# EAGLE board ALIM (EAGLE 7.2.0)
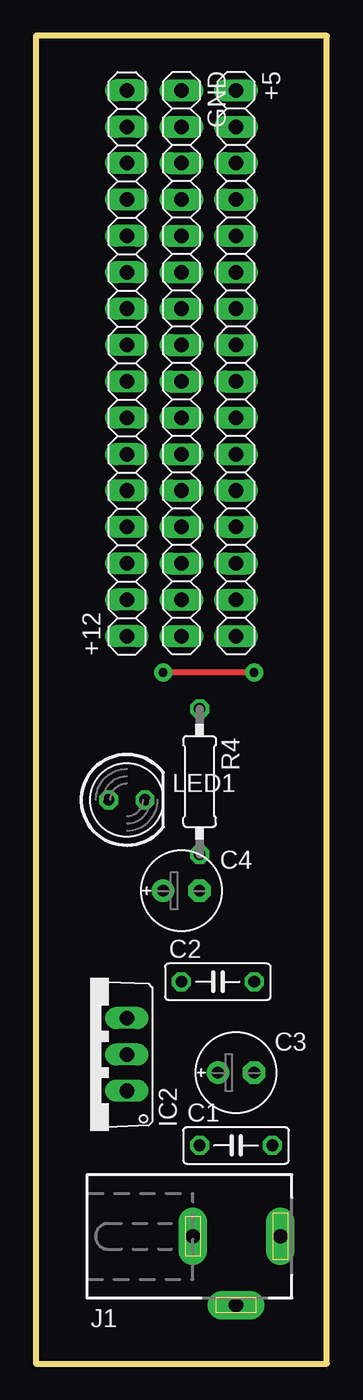
[diagram p0: board, top side]
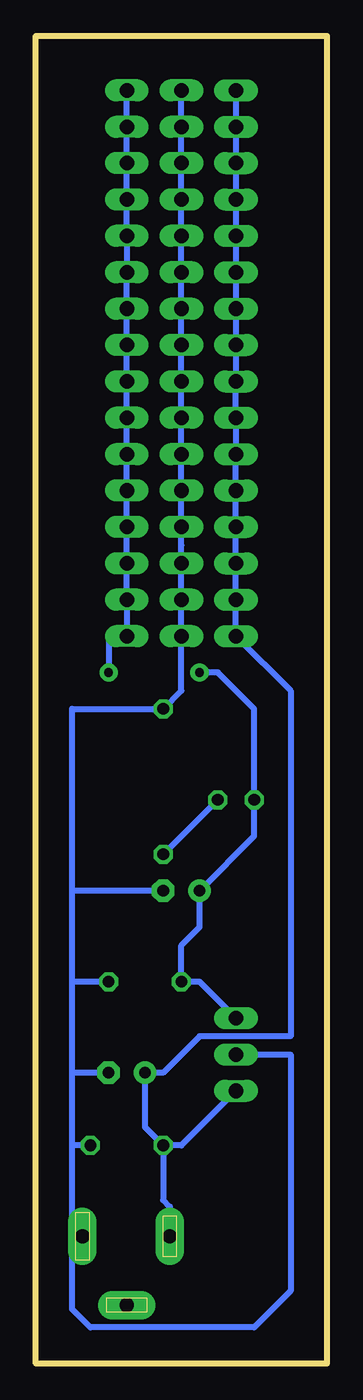
[diagram p1: board, bottom side, seen from below]

Size 20.32 x 92.71 mm. Coordinates in mm from the lower left corner, seen from the top.
Outline: 20.32,0 20.32,92.71 0,92.71 0,0 20.32,0
Copper layers (1*16): Top 0.035mm / dielectric 1.5mm / Bottom 0.035mm
Design rules "default": minimum track width 10mil, minimum drill 24mil, track to track 8mil, track to pad 8mil, pad to pad 8mil, via to via 8mil, smd to smd 8mil, copper to edge 40mil, drill to drill 8mil, minimum pad ring 10mil, minimum via ring 8mil, stop-mask expansion 4mil, vias tented up to drill 0mil, thermal gap 10mil

## Footprints (pad centres in the part's own frame; a part is rotated, then mirrored left to right if it is on the bottom)
1X16 = drill 1.016 long: 1 -19.05,0; 2 -16.51,0; 3 -13.97,0; 4 -11.43,0; 5 -8.89,0; 6 -6.35,0; 7 -3.81,0; 8 -1.27,0; 9 1.27,0; 10 3.81,0; 11 6.35,0; 12 8.89,0; 13 11.43,0; 14 13.97,0; 15 16.51,0; 16 19.05,0
C050-025X075 = drill 0.813 octagon: 1 -2.54,0; 2 2.54,0
E2,5-6E = drill 0.813 pad 1.575: + -1.27,0 | drill 0.813 pad 1.575 octagon: - 1.27,0
TO220V = drill 1.016 long: 1 -2.54,-2.54; 2 0,-2.54; 3 2.54,-2.54
DCJ0303 = drill 1 pad 2 long: 1 0,3.1; 2 4.8,0; 3 0,-3
LED5MM = drill 0.813 octagon: A -1.27,0; K 1.27,0
0207/10 = drill 0.813 octagon: 1 -5.08,0; 2 5.08,0

## Placement (x,y rotation side)
+5  [1X16]  13.97,69.85 270 top
+12  [1X16]  6.35,69.85 90 top
C1  [C050-025X075]  13.97,15.24 0 top
C2  [C050-025X075]  12.7,26.67 0 top
C3  [E2,5-6E]  13.97,20.32 0 top
C4  [E2,5-6E]  10.16,33.02 0 top
GND  [1X16]  10.16,69.85 270 top
IC2  7805TV  [TO220V]  3.81,21.59 90 top
J1  [DCJ0303]  13.97,8.89 270 top
LED1  RED  [LED5MM]  6.35,39.37 0 top
R4  220  [0207/10]  11.43,40.64 270 top

## Library data of the parts
+5 +12 GND = pinhead
C1 C2 R4 = resistor
C3 C4 = rcl
IC2 = linear
J1 = con-jack; OC_FARNELL: unknown; OC_NEWARK: unknown
LED1 = led

## Nets
N$2: LED1.K R4.2
N$26: C1.2 C2.2 C3.- C4.- GND.1 GND.2 GND.3 GND.4 GND.5 GND.6 GND.7 GND.8 GND.9 GND.10 GND.11 GND.12 GND.13 GND.14 GND.15 GND.16 IC2.2 J1.1 R4.1
N$129: +12.1 +12.2 +12.3 +12.4 +12.5 +12.6 +12.7 +12.8 +12.9 +12.10 +12.11 +12.12 +12.13 +12.14 +12.15 +12.16 C1.1 C3.+ IC2.1 J1.3
N$131: +5.1 +5.2 +5.3 +5.4 +5.5 +5.6 +5.7 +5.8 +5.9 +5.10 +5.11 +5.12 +5.13 +5.14 +5.15 +5.16 C2.1 C4.+ IC2.3 LED1.A

## Tracks (layer width: path | path; a pad name or v marks a point on that pad's centre or on a via)
N$2
  Bottom 0.406: R4.2 LED1.K
N$26
  Bottom 0.406: J1.1 17.78,9.6 | 17.78,9.6 17.78,15.24 | C1.2 17.78,15.24 | 17.78,15.24 17.78,20.32 | C3.- 17.78,20.32 | 17.78,20.32 17.78,26.67 | C2.2 17.78,26.67 | 17.78,26.67 17.78,33.02 | C4.- 17.78,33.02 | 17.78,33.02 17.78,45.72 R4.1 10.16,46.99 GND.16 GND.15 GND.14 | GND.14 10.16,57.15 | GND.14 GND.13 GND.12 GND.11 GND.10 GND.9 GND.8 GND.7 GND.6 GND.5 GND.4 GND.3 GND.2 GND.1 | IC2.2 2.54,21.59 2.54,5.08 5.08,2.54 16.51,2.54 17.78,3.81 17.78,9.6
N$129
  Bottom 0.406: C1.1 11.43,11.43 10.97,10.97 J1.3 | C1.1 12.7,16.51 C3.+ 11.43,20.32 8.89,22.86 2.54,22.86 2.54,46.99 +12.1 +12.2 +12.3 +12.4 +12.5 +12.6 +12.7 +12.8 +12.9 +12.10 +12.11 +12.12 +12.13 +12.14 +12.15 +12.16 | IC2.1 10.16,15.24 C1.1
N$131  (via drill 0.6 pad 1.27)
  Top 0.406: v15.24,48.26 v8.89,48.26
  Bottom 0.406: IC2.3 8.89,26.67 C2.1 10.16,29.21 8.89,30.48 C4.+ 5.08,36.83 LED1.A 5.08,45.72 7.62,48.26 v8.89,48.26 | +5.1 +5.2 +5.3 +5.4 +5.5 +5.6 +5.7 +5.8 +5.9 +5.10 +5.11 +5.12 +5.13 +5.14 +5.15 +5.16 15.24,50.8 v15.24,48.26